# EAGLE board PrimaryBoard (EAGLE 9.4.2)
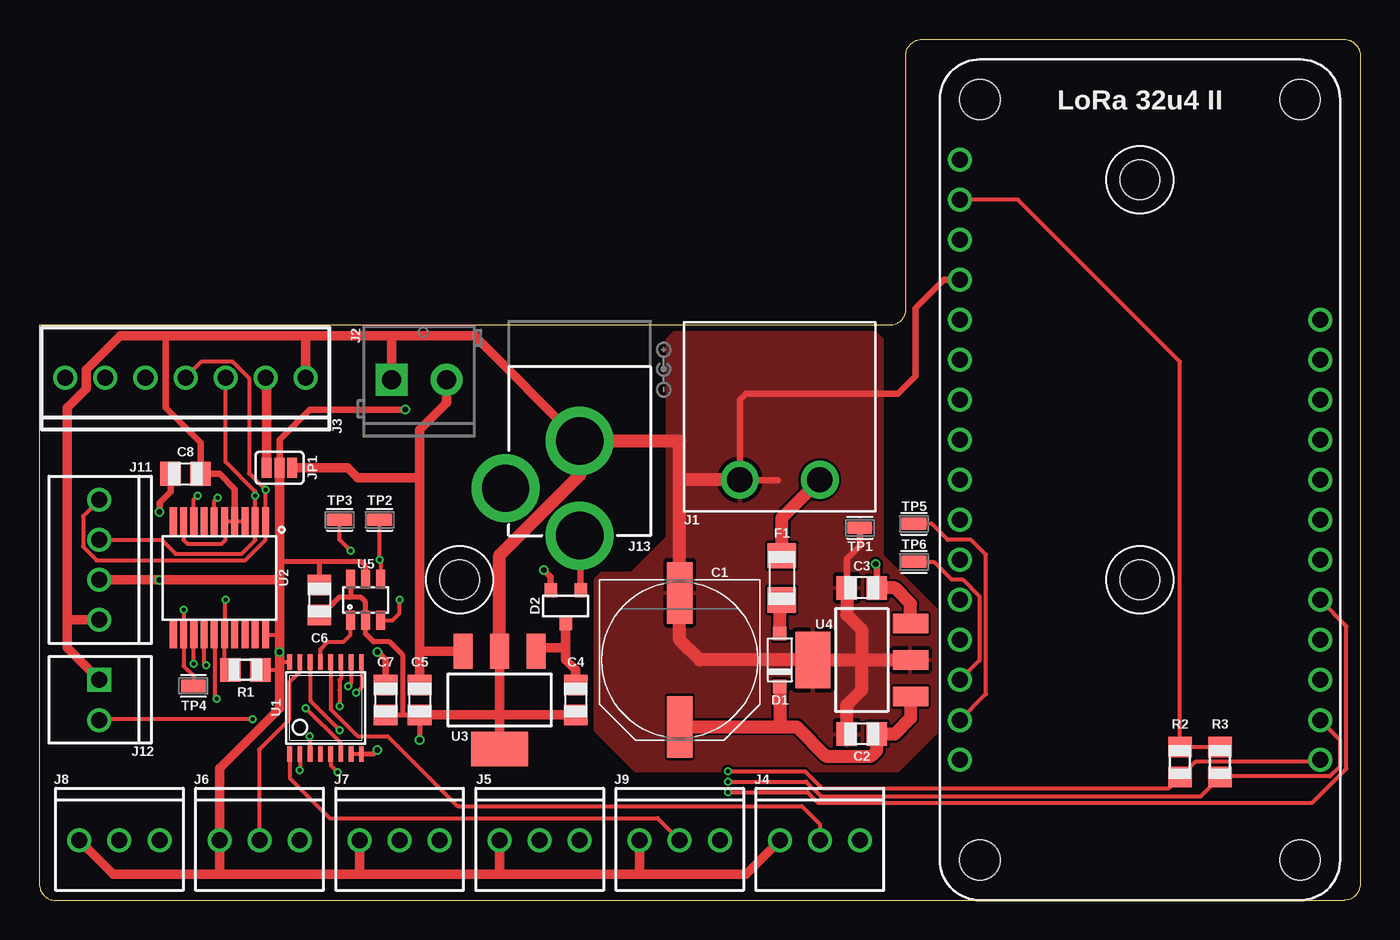
[diagram p0: board, top side]
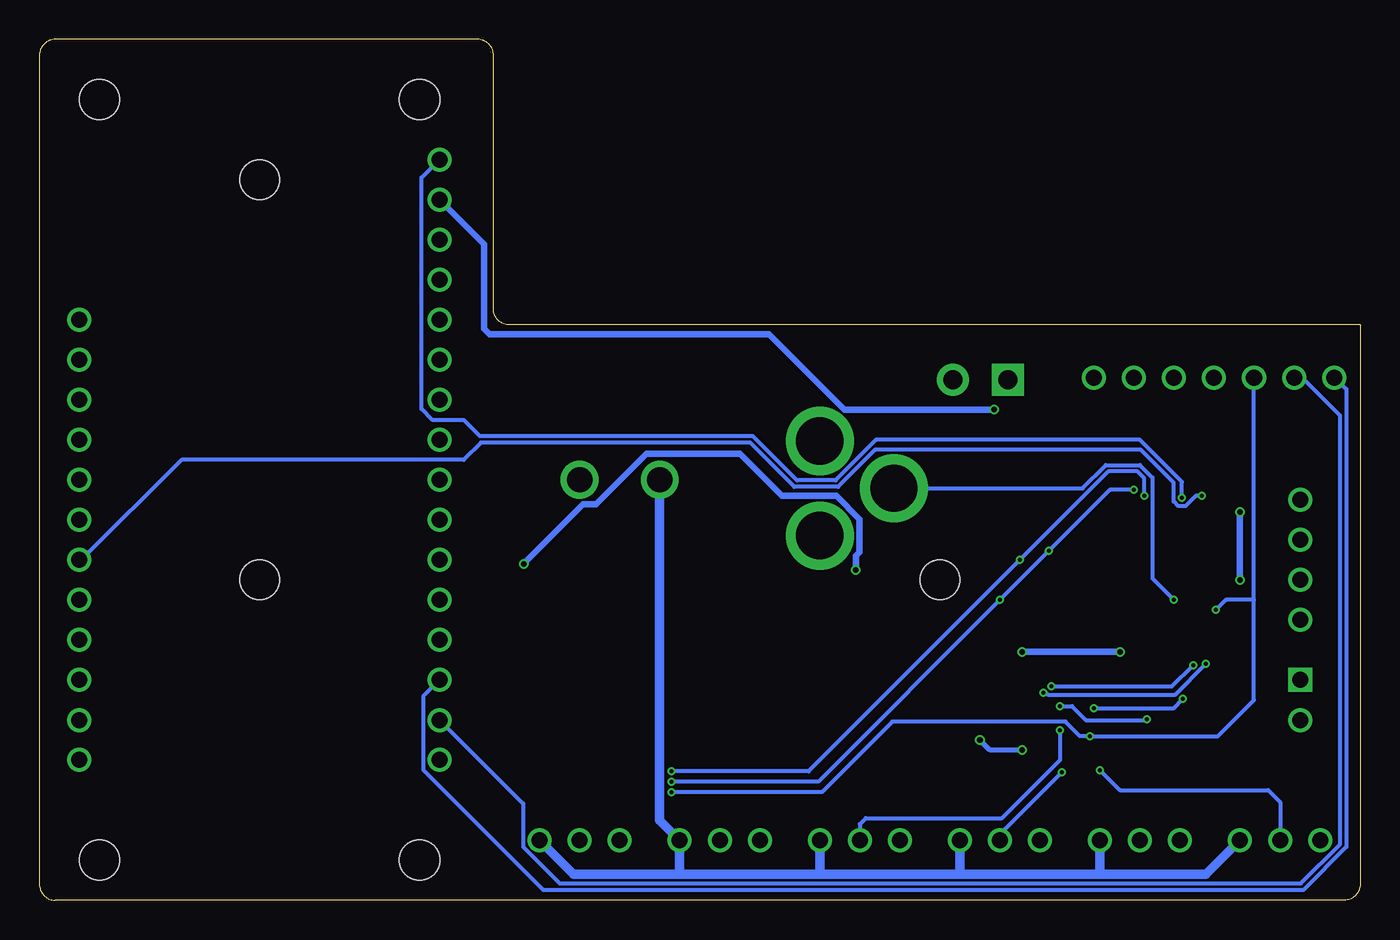
[diagram p1: board, bottom side, seen from below]

Size 83.82 x 54.61 mm. Coordinates in mm from the lower left corner, seen from the top.
Outline: 83.82,53.61 83.82,1 arc-90 82.82,0 1,0 arc-90 0,1 0,36.5 54,36.5 arc90 55,37.5 55,53.61 arc-90 56,54.61 82.82,54.61 arc-90 83.82,53.61
Copper layers (1*16): Top 0.035559375mm / dielectric 1.6mm / Bottom 0.035559375mm
Design rules "oshpark-2layer": minimum track width 6mil, minimum drill 10mil, track to track 6mil, track to pad 6mil, pad to pad 6mil, via to via 6mil, smd to smd 6mil, copper to edge 15mil, drill to drill 6mil, minimum pad ring 5mil, minimum via ring 5mil, stop-mask expansion 2.5mil, vias tented up to drill 0mil, thermal gap 10mil

## Footprints (pad centres in the part's own frame; a part is rotated, then mirrored left to right if it is on the bottom)
PANASONIC_G = smd 3.9 x 1.6: + 4.25,0; - -4.25,0
C0805 = smd 1.3 x 1.5: 1 -0.95,0; 2 0.95,0
SOD-123 = smd 0.85 x 0.85: ANODE 1.675,0; CAT -1.675,0
SOT23-3 = smd 0.8 x 0.9: 1 -0.95,-1; 2 0.95,-1; 3 0,1.1
1206 = smd 1.6 x 1.8: 1 -1.4,0; 2 1.4,0
2_56 = hole 2.5: 0,0
1X02_39532_RIGHT = drill 1.6: 1 0,2.54; 2 0,-2.54
SCREWTERMINAL-3.5MM-2-NS = drill 1.2 pad 2.032 square: 1 0,0 | drill 1.2 pad 2.032: 2 3.5,0
1X07_SCREW = drill 1.016: 1 -6.35,0; 2 -3.81,0; 3 -1.27,0; 4 1.27,0; 5 3.81,0; 6 6.35,0; 7 8.89,0
1X03_SCREW = drill 1.016: 1 -2.54,0; 2 0,0; 3 2.54,0
LORA32U4II = drill 1.016: 3V3 -11.43,-8.89; 9 -11.43,-31.75; 10 -11.43,-34.29; 11 -11.43,-36.83; 12 11.43,-29.21; 18 11.43,-41.91; 19 11.43,-44.44; 20 -11.43,-39.37; 21 -11.43,-41.91; 26 11.43,-26.67; 27 11.43,-36.83; 29 11.43,-34.29; 30 11.43,-31.75; 31 11.43,-39.37; 32 11.43,-24.13; 36 -11.43,-16.51; 37 -11.43,-19.05; 38 -11.43,-21.59; 39 -11.43,-24.13; 40 -11.43,-26.67; 41 -11.43,-29.21; AREF -11.43,-11.43; BAT 11.43,-16.51; DIO1 -11.43,-44.44; EN 11.43,-19.05; GND -11.43,-13.97; RST -11.43,-6.35; USB 11.43,-21.59 | hole 2.54: -10.16,-2.54; 10.16,-2.54; -10.16,-50.8; 10.16,-50.8
1X04_SCREW = drill 1.016: 1 -3.81,0; 2 -1.27,0; 3 1.27,0; 4 3.81,0
1X02_2.54_SCREWTERM = drill 1.016: P1 1.27,0 | drill 1.016 square: P2 -1.27,0
POWER_JACK_PTH = drill 2.997 pad 4.318: GND 0,7.7; GNDBREAK 4.7,10.7; PWR 0,13.7
SMT-JUMPER_3_1-NC_PASTE_SILK = smd 0.635 x 1.27: 1 -0.813,0; 2 0,0; 3 0.813,0
R0805 = smd 1.3 x 1.5: 1 -0.95,0; 2 0.95,0
TESTPOINT_0603 = smd 1.6 x 0.8: 1 0,0
TSSOP16 = smd 0.305 x 0.991: 1 -2.275,-2.918; 2 -1.625,-2.918; 3 -0.975,-2.918; 4 -0.325,-2.918; 5 0.325,-2.918; 6 0.975,-2.918; 7 1.625,-2.918; 8 2.275,-2.918; 9 2.275,2.918; 10 1.625,2.918; 11 0.975,2.918; 12 0.325,2.918; 13 -0.325,2.918; 14 -0.975,2.918; 15 -1.625,2.918; 16 -2.275,2.918
SSOP20 = smd 0.45 x 1.75: 1 -2.925,-3.6; 2 -2.275,-3.6; 3 -1.625,-3.6; 4 -0.975,-3.6; 5 -0.325,-3.6; 6 0.325,-3.6; 7 0.975,-3.6; 8 1.625,-3.6; 9 2.275,-3.6; 10 2.925,-3.6; 11 2.925,3.6; 12 2.275,3.6; 13 1.625,3.6; 14 0.975,3.6; 15 0.325,3.6; 16 -0.325,3.6; 17 -0.975,3.6; 18 -1.625,3.6; 19 -2.275,3.6; 20 -2.925,3.6
SOT223 = smd 1.219 x 2.235: 1 -2.311,-3.099; 2 0,-3.099; 3 2.311,-3.099 | smd 3.6 x 2.2: 4 0,3.099
SOT23-6L = smd 0.55 x 1.2: 1 -0.95,-1.3; 2 0,-1.3; 3 0.95,-1.3; 4 0.95,1.3; 5 0,1.3; 6 -0.95,1.3

## Placement (x,y rotation side)
C1  1000uF  [PANASONIC_G]  40.64,15.24 270 top
C2  0.33uF  [C0805]  52.2,10.54 180 top
C3  0.1uF  [C0805]  52.2,19.81 180 top
C4  1uF  [C0805]  34.04,12.7 270 top
C5  1uF  [C0805]  24.13,12.7 270 top
C6  0.1uF  [C0805]  17.78,19.05 270 top
C7  0.1uF  [C0805]  21.97,12.7 270 top
C8  0.1uF  [C0805]  9.27,27.05 0 top
D1  [SOD-123]  46.99,15.24 90 top
D2  DIODE_CCSDM40E20LCSOT23  [SOT23-3]  33.4,18.67 180 top
F1  50/150mA  [1206]  47.12,20.45 270 top
H1  [2_56]  26.67,20.32 0 top
H2  [2_56]  69.85,20.32 0 top
H3  [2_56]  69.85,45.72 0 top
J1  [1X02_39532_RIGHT]  46.99,26.67 90 top
J2  [SCREWTERMINAL-3.5MM-2-NS]  22.35,33.02 0 top
J3  [1X07_SCREW]  10.54,33.15 180 top
J4  CONN_32.54_SCREW  [1X03_SCREW]  49.53,3.81 180 top
J5  CONN_32.54_SCREW  [1X03_SCREW]  31.75,3.81 180 top
J6  CONN_32.54_SCREW  [1X03_SCREW]  13.97,3.81 180 top
J7  CONN_32.54_SCREW  [1X03_SCREW]  22.86,3.81 180 top
J8  CONN_32.54_SCREW  [1X03_SCREW]  5.08,3.81 180 top
J9  CONN_32.54_SCREW  [1X03_SCREW]  40.64,3.81 180 top
J10  LORA32U4II  [LORA32U4II]  69.85,53.34 0 top
J11  CONN_42.54_SCREW  [1X04_SCREW]  3.81,21.59 90 top
J12  [1X02_2.54_SCREWTERM]  3.81,12.7 270 top
J13  POWER_JACK  [POWER_JACK_PTH]  34.29,36.83 180 top
JP1  JUMPER-SMT_3_1-NC_PASTE_SILK  [SMT-JUMPER_3_1-NC_PASTE_SILK]  15.24,27.43 0 top
R1  100k  [R0805]  13.08,14.61 0 top
R2  10k  [R0805]  72.39,8.76 90 top
R3  10k  [R0805]  74.93,8.76 90 top
TP1  TESTPOINTRCU  [TESTPOINT_0603]  52.07,23.62 0 top
TP2  TESTPOINTRCU  [TESTPOINT_0603]  21.59,24.13 0 top
TP3  TESTPOINTRCU  [TESTPOINT_0603]  19.05,24.13 0 top
TP4  TESTPOINTRCU  [TESTPOINT_0603]  9.78,13.59 180 top
TP5  TESTPOINTRCU  [TESTPOINT_0603]  55.5,23.88 0 top
TP6  TESTPOINTRCU  [TESTPOINT_0603]  55.5,21.46 0 top
U1  CD74HC4052PW  [TSSOP16]  18.16,12.19 0 top
U2  MCP23008SSOP  [SSOP20]  11.43,20.45 180 top
U3  TC1262-3.3V  [SOT223]  29.21,12.7 180 top
U4  UA78M05SOT223  [SOT223]  52.2,15.24 90 top
U5  MCP3421A3  [SOT23-6L]  20.7,19.05 0 top

## Library data of the parts
C1 = bschulz_passives; DIGIKEY: P122428CT-ND; MF: Panasonic; MPN: EEE-FT1E102UP; SPICEPREFIX: C
C2-C8 R1-R3 = bschulz_passives
D1 = bschulz; DIGIKEY: 1N5819HW-FDICT-ND; MF: Diodes Incorporated; MPN: 1N5819HW-7-F
D2 = bschulz; DIGIKEY: SDM40E20LC-7DICT-ND; MF: Diodes Incorporated; MPN: SDM40E20LC-7
F1 = bschulz; DIGIKEY: 507-1793-1-ND; MF: Bell Fuse; MPN: 0ZCJ0005FF2E
H1-H3 J3 J10 = bschulz
J1 = bschulz; DIGIKEY: WM7845-ND; MF: Molex; MPN: 0395321002
J2 = bschulz; PROD_ID: CONN-08399
J4-J9 = bschulz; DIGIKEY: ED10562-ND; MF: On Shore; MPN: OSTVN03A150
J11 = bschulz; DIGIKEY: ED10563-ND; MF: On Shore; MPN: OSTVN04A150
J12 = bschulz; DIGIKEY: ED10561-ND; MF: OnShore; MPN: OSTVN02A150
J13 = bschulz; PROD_ID: CONN-08197
JP1 = SparkFun-Jumpers
TP1-TP6 = bschulz; DIGIKEY: A106145CT-ND; MF: TE Connectivity; MPN: RCU-0C
U1 = bschulz; DIGIKEY: 296-17619-1-ND; MF: TI; MPN: CD74HC4052PWR
U2 = bschulz; DIGIKEY: MCP23008T-E/SSCT-ND; MF: Microchip; MPN: MCP23008T-E/SS
U3 = bschulz; DIGIKEY: TC1262-3.3VDBCT-ND; DISP: TC1262-3.3V; MF: Microchip; MPN: TC1262-3.3VDBTR
U4 = bschulz; DIGIKEY: 296-17616-1-ND; DISP: UA78M05; MF: TI; MPN: UA78M05IDCYR
U5 = bschulz; DIGIKEY: MCP3421A3T-E/CHCT-ND; DISP: MCP3421; MF: Microchip; MPN: MCP3421A3T-E/CH

## Nets
3V3_CORE: C6.1 C7.1 C8.1 J4.3 J5.3 J6.3 J7.3 J8.3 J9.3 J10.3V3 J11.2 JP1.2 R1.2 R2.2 R3.2 U1.16 U2.20 U5.5
3V3_EXT: J3.2 JP1.1
3V3_MAIN: C5.1 J2.2 JP1.3 U3.3
5V: C3.1 D2.2 U4.3
5V_CORE: C4.1 D2.3 U3.1
5V_EXT: D2.1 J13.PWR
5V_EXT_SENSE: J13.GNDBREAK R1.1 U2.16
24V_AC: F1.1 J1.2
A0: J4.2 U1.12
A1: J5.2 U1.14
A2: J6.2 U1.15
A3: J12.P1 U1.11
A_COM: U1.13 U5.1
BAT: J10.BAT
GND: C1.- C2.2 C3.2 C4.2 C5.2 C6.2 C7.2 C8.2 J1.1 J2.1 J3.1 J4.1 J5.1 J6.1 J7.1 J8.1 J9.1 J10.GND J11.1 J12.P2 J13.GND TP1.1 U1.7 U1.8 U2.3 U2.4 U2.5 U2.9 U3.2 U3.4 U4.2 U4.4 U5.2 U5.6
IO_EN: U1.6 U2.15
IO_INT: J10.30 U2.8
LORA_EN: J10.EN
N$3: D1.ANODE F1.2
ONEWIRE: J3.5 J10.29 TP4.1 U1.3 U2.12
OW0: J9.2 U1.1
OW1: J7.2 U1.5
OW2: J8.2 U1.2
OW3: U1.4
RESET: J10.RST U2.6
RX: J3.7 J10.20 TP6.1
S0: U1.10 U2.14
S1: U1.9 U2.13
SCL: J3.4 J10.18 J11.4 R3.1 TP3.1 U2.1 U5.3
SDA: J3.3 J10.19 J11.3 R2.1 TP2.1 U2.2 U5.4
TX: J3.6 J10.21 TP5.1
USB: J10.USB
V_RECT: C1.+ C2.1 D1.CAT U4.1

## Tracks (layer width: path | path; a pad name or v marks a point on that pad's centre or on a via)
3V3_CORE  (via drill 0.35)
  Top 0.254: U2.20 15.16,16.85 15.24,16.76 | U1.16 15.24,15.11 | R1.2 15.24,14.61 | R3.2 R2.2 72.39,34.16 62.1,44.45 J10.3V3
  Top 0.305: 15.3,18.1 15.24,18.16 | U5.5 20.7,21.21 20.45,21.46 17.78,21.46 | 15.24,21.34 15.37,21.46 17.78,21.46 | C6.1 17.78,21.46
  Top 0.406: JP1.2 15.24,29.21 17.14,31.11 v23.24,31.11 | C7.1 21.97,15.24 v21.46,15.75 | C8.1 8.32,25.91 7.62,25.21 v7.62,24.64
  Top 0.61: JP1.2 15.24,21.34 15.24,20.32 | 15.24,20.32 15.24,18.16 15.24,16.76 v15.24,15.75 15.24,15.11 15.24,14.61 15.24,12.19 11.43,8.38 J6.3 11.43,1.65 | J8.3 4.7,1.65 11.43,1.65 | J4.3 44.83,1.65 38.1,1.65 | 11.43,1.65 20.32,1.65 | 20.32,1.65 29.21,1.65 | 29.21,1.65 38.1,1.65 | J9.3 38.1,1.65 | J5.3 29.21,1.65 | J7.3 20.32,1.65 | J11.2 v7.62,20.32 15.24,20.32
  Bottom 0.406: v23.24,31.11 32.72,31.11 37.52,35.92 55.24,35.92 55.58,36.26 55.58,41.61 J10.3V3 | v21.46,15.75 v15.24,15.75 | v7.62,24.64 v7.62,20.32
3V3_EXT
  Top 0.61: JP1.1 14.43,33.07 J3.2
3V3_MAIN
  Top 0.61: C5.1 24.13,15.75 | U3.3 24.18,15.8 24.13,15.75 | J2.2 25.85,31.57 24.13,29.84 24.13,26.8 | 24.13,15.75 24.13,26.8 | JP1.3 19.56,27.43 20.19,26.8 24.13,26.8
5V  (via drill 0.35)
  Top 0.406: D2.2 32.45,20.51 v32,20.95 | v53.09,21.34 53.15,21.27 C3.1
  Top 0.813: U4.3 55.3,18.81 54.29,19.81 C3.1
  Bottom 0.406: v53.09,21.34 49.31,25.11 48.51,25.11 45.3,28.32 39.37,28.32 36.69,25.64 33.25,25.64 31.77,24.17 31.77,22.09 32,21.86 v32,20.95
5V_CORE
  Top 0.61: D2.3 33.4,16 | 33.4,16 33.4,15.24 34.04,14.61 C4.1 | U3.1 31.73,16 33.4,16
5V_EXT
  Top 0.406: J13.PWR 34.35,23.07 D2.1
5V_EXT_SENSE  (via drill 0.25)
  Top 0.254: v11.81,19.05 11.76,18.99 U2.16 11.76,14.98 R1.1
  Bottom 0.254: v11.81,19.05 13.17,20.41 13.17,26.81 13.97,27.6 16.15,27.6 17.62,26.13 J13.GNDBREAK
24V_AC
  Top 0.813: F1.1 47.12,24.26 J1.2
A0
  Top 0.254: U1.12 18.49,12.12 20.19,10.41 22.1,10.41 26.54,5.97 48.39,5.97 49.53,4.83 J4.2
A1  (via drill 0.25)
  Top 0.254: U1.14 17.19,12.66 v19.05,10.79
  Bottom 0.254: v19.05,10.79 19.05,8.89 22.73,5.21 31.37,5.21 31.75,4.83 J5.2
A2
  Top 0.254: J6.2 13.94,3.84 13.94,9.56 15.84,11.46 15.84,13.81 16.54,14.5 U1.15
A3  (via drill 0.25)
  Top 0.254: v13.53,11.49 3.87,11.49 J12.P1 | U1.11 19.14,14.06 19.05,13.97 19.05,13.35 19.05,13.34 v19.05,12.32
  Bottom 0.254: v19.05,12.32 18.29,12.32 17.4,11.43 13.59,11.43 v13.53,11.49
A_COM
  Top 0.254: U1.13 17.84,15.93 18.29,16.38 19.3,16.38 19.75,16.83 U5.1
GND  (via drill 0.35)
  Top 0.254: U1.7 U1.8 | U2.3 U2.4 U2.5 11.81,23.99 11.81,22.86 11.56,22.61 9.4,22.61 9.15,22.85 U2.9
  Top 0.305: v24.13,10.16 C5.2 23.07,11.75 | U1.8 21.21,9.27 v21.46,9.53 | 23.07,11.75 23.07,15.53 22.23,16.38 21.21,16.38 20.7,16.89 U5.2 20.7,18.92 20.41,19.21 19.68,19.21 | C7.2 23.07,11.75 | C6.2 17.91,18.1 19.02,19.21 19.68,19.21 | U5.6 19.75,19.28 19.68,19.21
  Top 0.406: J10.GND 57.4,39.37 55.58,37.55 55.58,33.23 54.48,32.13 44.83,32.13 44.45,31.75 J1.1 44.48,26.64 46.86,26.64 | 8,35.81 8,31.24 10.22,29.02 C8.2 11.43,27.05 12.4,26.08 U2.4 | C3.2 51.25,21.66 52.07,22.48 TP1.1
  Top 0.61: U3.2 29.21,11.81 | U3.4 29.21,11.81 | C4.2 29.27,11.75 | 29.27,11.75 29.21,11.81 | C5.2 29.27,11.75 | J13.GND 27.61,35.81 22.35,35.81 | J12.P2 1.78,16 1.78,17.78 | 22.35,35.81 16.89,35.81 | 16.89,35.81 8,35.81 5.13,35.81 2.97,33.65 2.97,32.44 1.78,31.24 1.78,17.78 | J11.1 1.78,17.78 | J2.1 22.35,35.81 | J3.1 16.89,35.81
  Top 0.813: J1.1 40.64,26.67 | 40.64,26.67 C1.- 40.64,16.51 41.91,15.24 U4.4 52.2,15.24 | 40.64,26.67 40.64,29.13 J13.GND 34.29,26.97 29.21,21.89 U3.2 | 52.2,15.24 U4.2 | C3.2 51.25,18.09 52.2,17.14 52.2,15.24 | C2.2 51.25,12.38 52.2,13.34 52.2,15.24
  Bottom 0.305: v21.46,9.53 23.5,9.53 v24.13,10.16
  Bottom 0.61: J8.1 9.78,1.65 16.51,1.65 | J4.1 49.91,1.65 43.31,1.65 | 16.51,1.65 25.4,1.65 | 25.4,1.65 34.29,1.65 | 34.29,1.65 43.31,1.65 | 43.31,1.65 43.18,1.78 J9.1 44.45,5.08 J1.1 | J5.1 34.29,1.65 | J7.1 25.4,1.65 | J6.1 16.51,1.65
  pour Top: 39.88,22.99 37.59,20.7 35.69,20.7 35.31,20.32 35.31,10.79 37.85,8.26 54.48,8.26 56.9,10.67 56.9,18.41 53.47,21.84 53.47,35.56 52.96,36.07 40.39,36.07 39.88,35.56
IO_EN  (via drill 0.25)
  Top 0.254: U1.6 19.14,9.96 v16.9,12.19 v16.89,12.19 | v11.24,12.77 11.13,12.88 11.13,16.82 U2.15
  Bottom 0.254: v16.89,12.19 11.82,12.19 v11.24,12.77
IO_INT  (via drill 0.25)
  Top 0.254: U2.8 9.8,25.43 v10.03,25.65
  Bottom 0.254: v10.03,25.65 10.42,25.65 11.08,24.99 11.52,24.99 11.84,25.31 11.84,26.49 13.91,28.57 30.79,28.57 33.13,26.23 35.9,26.23 38.7,29.03 55.8,29.03 56.9,27.94 74.8,27.94 81.15,21.59 J10.30
N$3
  Top 0.813: D1.ANODE 46.99,18.92 F1.2
ONEWIRE  (via drill 0.25)
  Top 0.254: U1.3 17.19,10.37 v17.14,10.41 | v9.14,18.41 U2.12 9.15,14.85 9.78,14.22 TP4.1 | v43.69,6.86 48.75,6.86 49.42,6.18 80.8,6.18 82.96,8.34 82.96,17.37 J10.29
  Bottom 0.254: 6.73,19.05 6.73,12.7 9.02,10.41 v17.14,10.41 17.79,10.41 18.7,11.33 29.69,11.33 34.16,6.86 v43.69,6.86 | 6.73,19.05 J3.5 | 6.73,19.05 8.51,19.05 v9.14,18.41
OW0
  Top 0.254: U1.1 15.89,7.74 18.41,5.21 39.24,5.21 J9.2
OW1  (via drill 0.25)
  Top 0.254: U1.5 18.49,8.56 v18.92,8.13
  Bottom 0.254: v18.92,8.13 22.86,4.19 J7.2
OW2  (via drill 0.25)
  Top 0.254: U1.2 16.54,8.28 v16.51,8.26
  Bottom 0.254: v16.51,8.26 15.24,6.99 5.84,6.99 5.08,6.22 J8.2
RESET  (via drill 0.25)
  Top 0.254: U2.6 11.11,25.33 v11.3,25.53
  Bottom 0.254: v11.3,25.53 11.3,26.53 13.97,29.2 30.73,29.2 33.3,26.64 35.73,26.64 38.53,29.44 55.85,29.44 56.87,30.45 58.85,30.45 59.56,31.17 59.56,45.85 J10.RST
RX
  Top 0.254: J10.20 59.66,15.21 59.66,19.28 58.6,20.34 57.89,20.34 56.77,21.46 TP6.1
  Bottom 0.254: J10.20 59.46,12.93 59.46,8.28 51.82,0.64 3.62,0.64 0.86,3.39 0.86,32.43 1.58,33.15 J3.7
S0  (via drill 0.25)
  Top 0.254: U1.10 19.79,13.77 v19.58,13.57 | v10.6,14.92 10.46,15.06 U2.14
  Bottom 0.254: v19.58,13.57 11.95,13.57 v10.6,14.92
S1  (via drill 0.25)
  Top 0.254: U1.9 20.44,13.49 v20.11,13.16 | v9.78,14.99 9.78,16.82 U2.13
  Bottom 0.254: v20.11,13.16 19.93,13.16 19.8,13.03 11.73,13.03 v9.78,14.99
SCL  (via drill 0.25)
  Top 0.254: J11.4 2.77,24.36 2.77,22.43 3.63,21.57 13.06,21.57 14.36,22.86 U2.1 v14.36,26.03 13.31,27.07 13.31,33.12 12.24,34.19 10.31,34.19 J3.4 | v43.69,7.52 48.66,7.52 49.59,6.59 73.71,6.59 R3.1 74.98,7.86 81.9,7.86 82.55,8.51 82.55,10.16 J10.18 | v19.75,22.16 19.05,22.86 TP3.1 | U5.3 22.41,17.75 22.86,18.2 v22.86,19.05
  Bottom 0.254: v14.36,26.03 15.88,26.03 v19.75,22.16 v22.86,19.05 34.39,7.52 v43.69,7.52
SDA  (via drill 0.25)
  Top 0.254: J3.3 11.81,27.81 13.71,25.92 v13.71,25.66 U2.2 13.71,22.85 12.83,21.97 8.64,21.97 7.75,22.86 J11.3 | U5.4 21.65,21.53 v21.59,21.59 TP2.1 | v43.69,8.18 48.59,8.18 49.66,7.11 71.69,7.11 R2.1 73.35,8.77 81.15,8.77 J10.19
  Bottom 0.254: v13.71,25.66 13.71,26.41 13.7,26.42 13.7,26.76 14.13,27.2 15.98,27.2 v21.59,21.59 35,8.18 v43.69,8.18
TX
  Top 0.254: J10.21 60.07,13.08 60.07,21.92 59.13,22.86 57.66,22.86 56.64,23.88 TP5.1
  Bottom 0.254: J10.21 53.11,6.12 53.11,3.38 50.8,1.07 3.76,1.07 1.27,3.56 1.27,30.73 3.68,33.15 J3.6
V_RECT
  Top 0.813: U4.1 55.3,11.55 54.29,10.54 C2.1 53.15,9.49 52.8,9.14 49.91,9.14 48.06,10.99 46.99,10.99 | C1.+ 46.99,10.99 | D1.CAT 46.99,10.99

## Text on the board
tDocu: 5V 0.5A | 9~12V 150mA DC / 24V 150mA AC | RX | TX | OW | SCL | SDA | 3v3 | GND | GND | 3v3 / OUT | I2C AUX | - | + | A3 | OW2 | A2 | OW1 | A1 | OW0 | A0
bDocu: Project-Palmer / Primary / v0.0 / Bobby Schulz | RX | TX | OWn | SCL | SDA | 3v3 | GND | GND | 3v3 / OUT | SCL | SDA | 3v3 | GND | GND | A3 | 3v3 | OW2 | GND | 3v3 | A2 | GND | 3v3 | OW1 | GND | 3v3 | A1 | GND | 3v3 | OW0 | GND | 3v3 | A0 | GND